# Altium PCB LKS_DEMO_V5.0.PcbDoc (part 1 of 4)
Units mil, origin at the board's own origin, x right, y up, seen from the top; angles counter-clockwise.
Board outline 5414.8 x 3354.56 mil, 2 copper layers (Top Layer, Bottom Layer); 131 components, 85 nets, 355 pads, 272 vias.
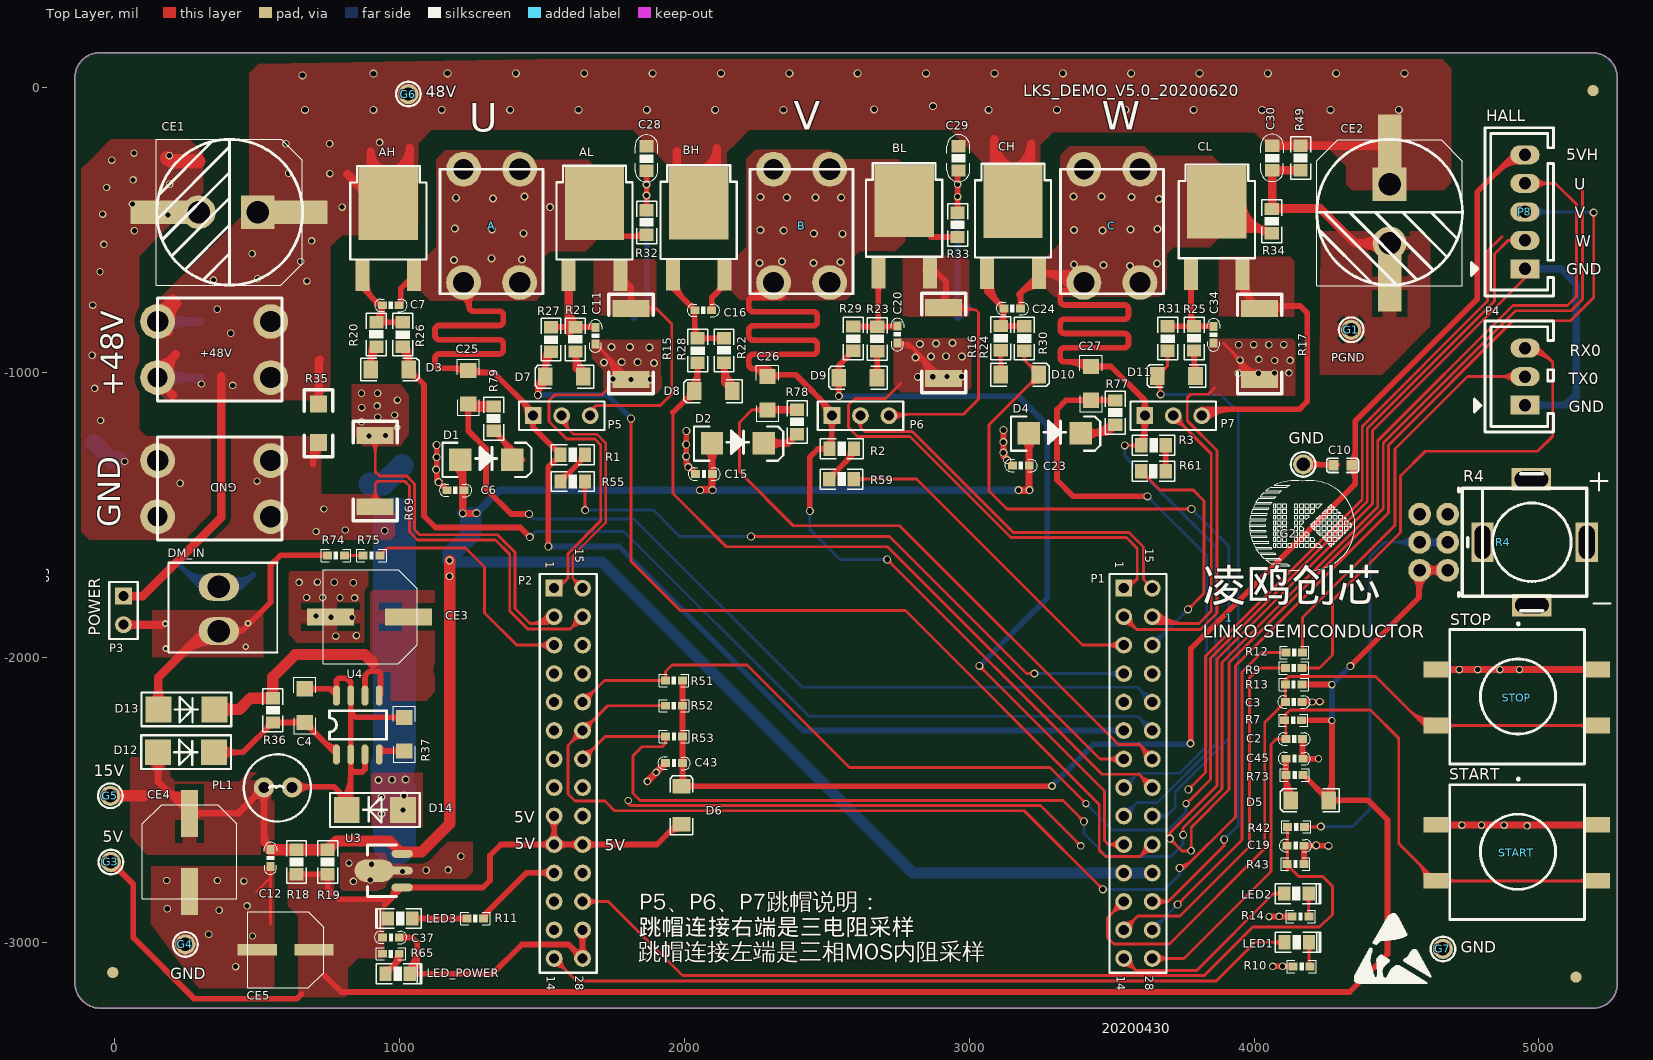
[diagram p0: Top Layer view]
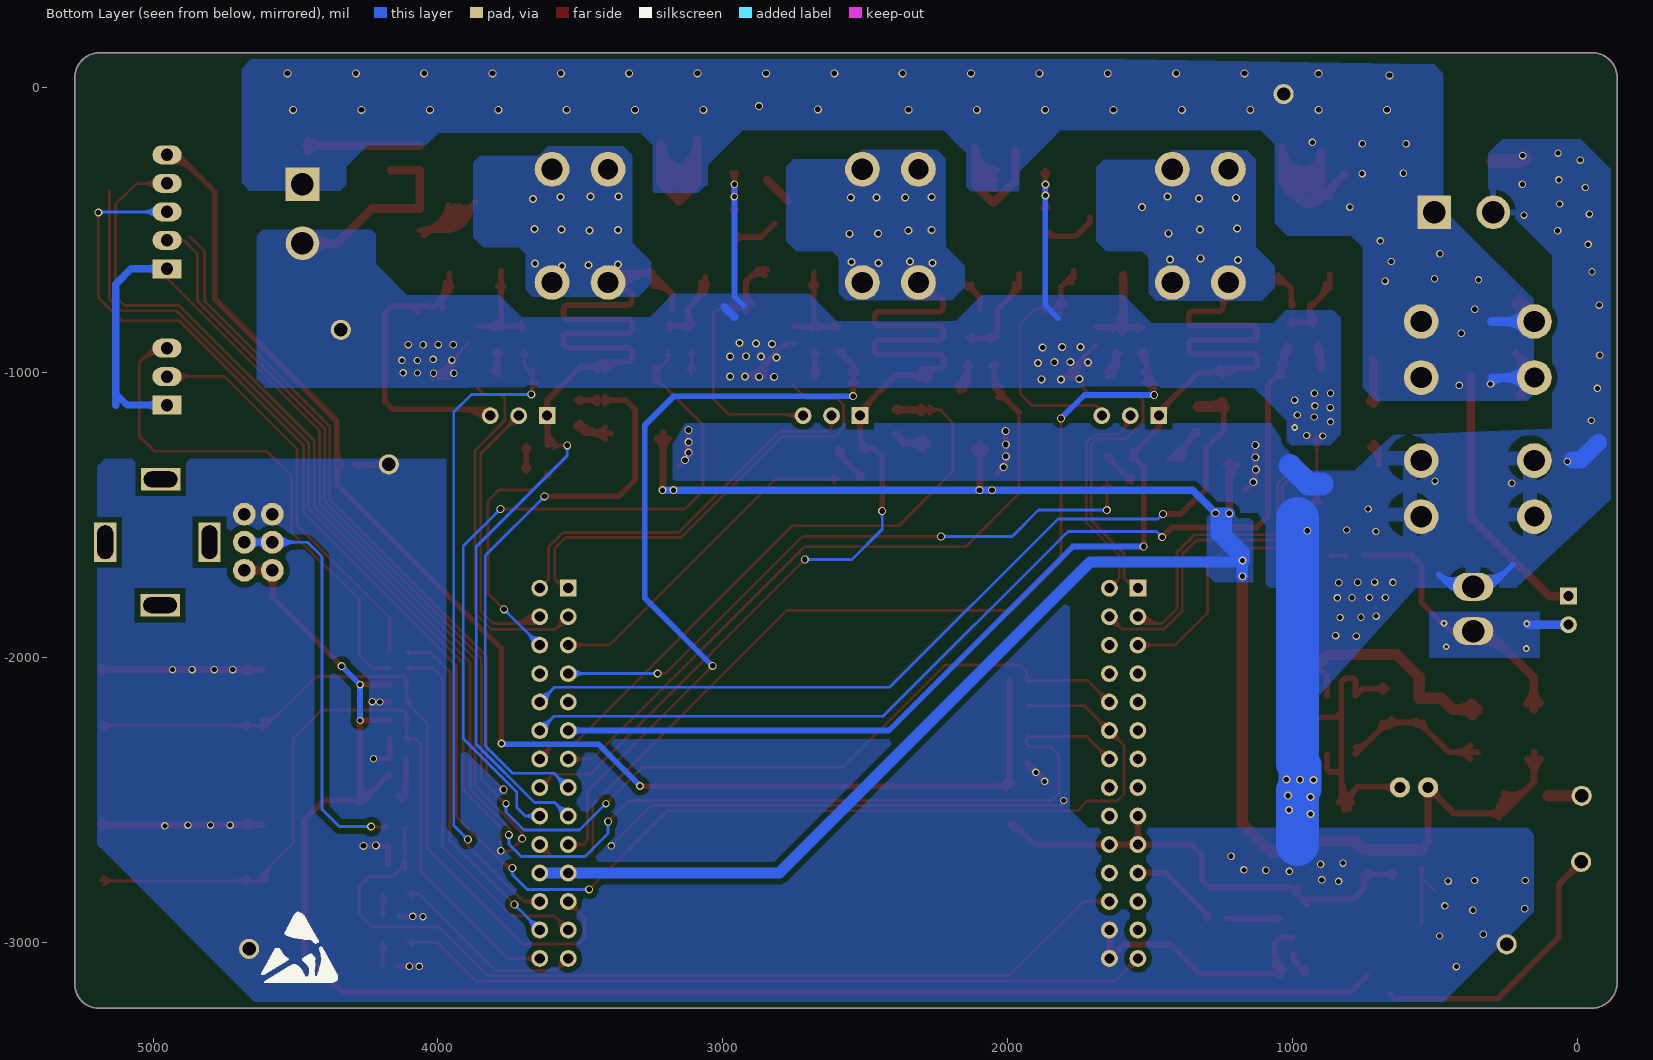
[diagram p1: Bottom Layer view, seen from below]

## Layer stack, top to bottom
Top Layer: signal copper 1.4
Dielectric: dielectric 12.6, FR-4, Dk 4.8
Bottom Layer: signal copper 1.4

## Board outline
-140.37,-3140.27 ccw(c-48.64,-3140.27) -48.64,-3232 5190.27,-3231.65 ccw(c5190.27,-3147.49) 5274.43,-3147.49 5274.43,35.95 ccw(c5187.82,35.95) 5187.82,122.56 -53.53,122.56 ccw(c-53.53,35.95) -140.14,35.95

## Design rules (kind name [scope] priority, off if disabled: settings)
Clearance [InPolygon] p1: gap=20
Clearance Clearance_48V [InNet('+48V')] p2: gap=30
Clearance Clearance_4 [InNet('PGND')] p3 off: gap=20
Clearance Clearance_5V [InNet('+5V')] p4 off: gap=20
Clearance Clearance_15V [InNet('+15V')] p5: gap=20
Clearance Clearance_5 [All] p6: gap=7.87
ComponentClearance [All] p1 off: gap=0 collisioncheckmode=3 verticalgap=0 showdistances=FALSE
FabricationTestpoint [(IsPad And (OnTopLayer Or OnBottomLayer))] p1: side=3 testpointundercomponent=TRUE minsize=40 maxsize=100 preferedsize=60 minholesize=0 maxholesize=40 preferedholesize=32 testpointgrid=1 allowsidetop=TRUE allowsidebottom=TRUE usegrid=TRUE gridtolerance=0.01
PlaneConnect [All] p1: planeconnectstyle=Direct reliefexpansion=20 reliefentries=4 reliefconductorwidth=10 reliefairgap=10
PolygonConnect [All] p1: connectstyle=Direct reliefconductorwidth=50 reliefentries=4 polygonreliefangle="90 Angle"
RoutingVias [All] p1: holewidth=13.78 width=19.68 viastyle="Through Hole" minholewidth=13.78 minwidth=19.68 maxholewidth=13.78 maxwidth=19.68
SilkscreenOverComponentPads SilkToSolderMaskClearance [IsPad] p1: minsilkscreentomaskgap=10
SolderMaskExpansion [All] p1: expansion=4
Width Width_2 [All] p1 off: maxlimit=10 minlimit=10 preferedwidth=10
Width Width_1 [InNet('5V-T')] p2 off: maxlimit=40 minlimit=40 preferedwidth=40
Width Width_VH [InNet('5V1')] p3 off: maxlimit=40 minlimit=40 preferedwidth=40
Width Width_5V [InNet('5V')] p4 off: maxlimit=40 minlimit=40 preferedwidth=40
Width Width_14.3V [InNet('+14.3V')] p5 off: maxlimit=50 minlimit=50 preferedwidth=50
Width Width_15V [InNet('+15V')] p6 off: maxlimit=40 minlimit=40 preferedwidth=40
Width Width_48V [InNet('+48V')] p7 off: maxlimit=40 minlimit=40 preferedwidth=40
Width [All] p8: maxlimit=200 minlimit=1 preferedwidth=40
24 further rules are at their usual default settings.

## Components (designator, comment, footprint, x,y, rotation, side; value= is the part's Value field where it differs from the comment)
1 "LKS_sign" LKS_LOGO2 3913.31,-1861.12 r0 top
+48V "M4" M4_CONECTOR 587.24,-737.97 r180 top
A "M4" M4_CONECTOR 1503.84,-723.16 r90 top
AH "NCE8295AK" TO-252 960.46,-532.18 r0 top
AL "NCE8295AK" TO-252 1684.09,-531.73 r0 top
B "M4" M4_CONECTOR 2592.15,-723.16 r90 top
BH "NCE8295AK" TO-252 2050.06,-530.17 r0 top
BL "NCE8295AK" TO-252 2771.14,-522.9 r0 top
C "M4" M4_CONECTOR 3681.8,-723.16 r90 top
C2 "100nF/50V" 0603C#1 4170.04,-2286.71 r180 top
C3 "100nF/50V" 0603C#1 4109.35,-2156.04 r0 top
C4 "10uF/100V" 1206#1 666.13,-2227.86 r90 top (schematic designator CF2)
C6 "100nF/50V" 0603C#1 1166.15,-1413.01 r0 top
C7 "10nF/50V" 0603C#1 939.25,-763.4 r0 top
C10 "100nF/50V" 0603C#2 4310.55,-1325.62 r180 top
C11 "10nF/50V" 0603C#1 1687.64,-841.38 r270 top
C12 "100nF/50V" 0603C#1 546.38,-2675.06 r270 top (schematic designator C351)
C15 "100nF/50V" 0603C#1 2039.42,-1355.82 r0 top
C16 "10nF/50V" 0603C#1 2036.35,-781.02 r0 top
C19 "100nF/50V" 0603C#1 4174.8,-2661.32 r180 top
C20 "10nF/50V" 0603C#1 2747.52,-836.3 r270 top
C23 "100nF/50V" 0603C#1 3151.34,-1325.92 r0 top
C24 "10nF/50V" 0603C#1 3121.14,-774.76 r0 top
C25 "10uF/25V" 1206#1 1240.4,-1110.36 r90 top (schematic designator CAH1)
C26 "10uF/25V" 1206#1 2291.34,-1131.27 r90 top (schematic designator CBH1)
C27 "10uF/25V" 1206#1 3426.66,-1096.7 r90 top (schematic designator CCH1)
C28 "100nF/100V" 0805C 1866.99,-290.99 r90 top (schematic designator CA)
C29 "100nF/100V" 0805C 2961.99,-290.67 r90 top (schematic designator CB)
C30 "100nF/100V" 0805C 4063.55,-289.6 r90 top (schematic designator CC)
C34 "10nF/50V" 0603C#1 3857.8,-837.72 r270 top
C37 "100nF/50V" 0603C#1 998.61,-2983.24 r180 top
C43 "100nF/50V" 0603C#1 1933.69,-2371.26 r0 top
C45 "100nF/50V" 0603C#1 4170.76,-2355.72 r180 top
CE1 "220uF/63V" "220UF/25V 12.5*12.5" 503.17,-437.15 r270 top (schematic designator CC3)
CE2 "220uF/63V" "220UF/25V 12.5*12.5" 4475.37,-337.23 r0 top (schematic designator CC1)
CE3 "10UF/100V" "220UF/25V paster8*10" 894.06,-1857.56 r270 top (schematic designator CF1)
CE4 "220uF/25V  8*10" "220UF/25V paster8*10" 262.36,-2684.79 r0 top (schematic designator C391)
CE5 "220uF/16V" "220UF/16V PASTER6.3*7.7 - DUPLICATE" 599.7,-3026.55 r270 top (schematic designator C36)
CH "NCE8295AK" TO-252 3153.33,-524.74 r0 top
CL "NCE8295AK" TO-252 3869.04,-527.35 r0 top
D1 "US1J" SMA金丰 1304.37,-1305.74 r0 top
D2 "US1J" SMA金丰 2187.53,-1248.27 r0 top
D3 "1N4007" D1206#1 898.55,-988.88 r0 top
D4 "US1J" SMA金丰 3300.41,-1213.21 r0 top
D5 "1N4007" D1206#2 4130.39,-2500.13 r0 top
D6 "1N4007" D1206#2 1990.99,-2454.23 r270 top
D7 "1N4007" D1206#1 1645.15,-1014.31 r180 top
D8 "1N4007" D1206#1 2167.67,-1065.43 r180 top
D9 "1N4007" D1206#1 2675.86,-1018.22 r180 top
D10 "1N4007" D1206#1 3110.43,-1007.51 r0 top
D11 "1N4007" D1206#1 3793.99,-1012.14 r180 top
D12 "ES1J" DO-214AC 250.05,-2333.06 r0 top (schematic designator DP1)
D13 "1N4007" DO-214AC 251.5,-2182.97 r0 top (schematic designator DD6)
D14 "ES1J" DO-214AC 912.83,-2535.22 r180 top (schematic designator D02)
DM_IN "CON2" SIP3.96-2 365.35,-1907.97 r90 top
G1 "PAD1.2" PAD1.2 4340.63,-849.76 r0 top
G2 "PAD1.2" PAD1.2 4171.95,-1322.36 r0 top
G3 "PAD1.2" PAD1.2 -13.75,-2718.17 r0 top
G4 "PAD1.2" PAD1.2 247.83,-3007.54 r0 top
G5 "PAD1.2" PAD1.2 -15.81,-2485.75 r0 top
G6 "PAD1.2" PAD1.2 1030.82,-22.05 r0 top (schematic designator G12)
G7 "PAD1.2" PAD1.2 4662.85,-3023.47 r0 top
GND "M4" M4_CONECTOR 587.24,-1226.14 r180 top
LED1 "LED" SOD323 4146.77,-2998.22 r0 top
LED2 "LED" SOD323 4145.98,-2827.12 r0 top
LED3 "LED" SOD323 1003.88,-2918.56 r180 top
LED_POWER "LED_R" SOD323 990.38,-3108.82 r0 top (schematic designator LED)
P1 "Header 14X2A" HDR2X14_CEN 3542.25,-1756.82 r270 top (schematic designator P7)
P2 "Header 14X2A" HDR2X14_CEN 1542.25,-1756.82 r270 top (schematic designator P5)
P3 "Header 2" HDR1X2 30.28,-1784.94 r270 top
P4 "P13" 2.54-XH-3A-180 4950.98,-1114.16 r270 top (schematic designator P13)
P5 "Header 3" HDR1X3 1468.79,-1151.24 r0 top (schematic designator P17)
P6 "Header 3" HDR1X3 2517.75,-1151.24 r0 top (schematic designator P18)
P7 "Header 3" HDR1X3 3616.05,-1151.24 r0 top (schematic designator P19)
P8 "Header 5" 2.54-XH-5A-180 4950.7,-435.64 r270 top (schematic designator P21)
PL1 "330uH" L_DIP_6*8MM 523.71,-2456.42 r0 top
R1 "20K 1%" 0805R 1650.48,-1288.54 r180 top
R2 "20K 1%" 0805R 2594.94,-1267.81 r180 top
R3 "20K 1%" 0805R 3689.51,-1255.52 r180 top
R4 "RPot" RK097-W-1 4874.36,-1595.66 r270 top
R7 "10K" 0603R 4166.32,-2220.83 r180 top
R9 "10R" 0603R 4109.61,-2037.33 r0 top
R10 "1K1%" 0603R 4195.91,-3084.6 r180 top
R11 "1K1%" 0603R 1236.12,-2916.6 r0 top (schematic designator R27)
R12 "10R" 0603R 4170.04,-1982.47 r180 top
R13 "10K" 0603R 4109.35,-2095.34 r0 top
R14 "1K1%" 0603R 4192,-2909.82 r180 top
R15 "0.005R/2512" 2512 1812.75,-776.09 r270 top (schematic designator R301)
R16 "0.005R/2512" 2512 2909.76,-1019.43 r90 top (schematic designator R302)
R17 "0.005R/2512" 2512 4019.41,-776.09 r270 top (schematic designator R303)
R18 "1.5K" 0805R 637.92,-2675.77 r270 top (schematic designator R791)
R19 "1.5K" 0805R 747.07,-2675.77 r270 top (schematic designator R761)
R20 "10R" 0805R 918.27,-823.64 r270 top (schematic designator K+A1)
R21 "10R" 0805R 1616.94,-840.56 r270 top (schematic designator K-A1)
R22 "10R" 0805R 2138.61,-879.87 r270 top (schematic designator K+B1)
R23 "10R" 0805R 2676.33,-839.51 r270 top (schematic designator K-B1)
R24 "10R" 0805R 3110.16,-836.37 r270 top (schematic designator K+C1)
R25 "10R" 0805R 3789.15,-837.14 r270 top (schematic designator K-C1)
R26 "51R" 0805R 1010.51,-909.43 r90 top (schematic designator K1)
R27 "51R" 0805R 1531.29,-926.62 r90 top (schematic designator K2)
R28 "51R" 0805R 2046.11,-965.39 r90 top (schematic designator K3)
R29 "51R" 0805R 2592.71,-923.58 r90 top (schematic designator K4)
R30 "51R" 0805R 3192.94,-922.91 r90 top (schematic designator K5)
R31 "51R" 0805R 3696.16,-923.03 r90 top (schematic designator K6)
R32 "51K" 0805R 1866.99,-429.93 r270 top (schematic designator RA1)
R33 "51K" 0805R 2958.78,-438.57 r270 top (schematic designator RB1)
R34 "51K" 0805R 4061.82,-425.61 r270 top (schematic designator RC1)
R35 "47K/0805" 1206#2 715.63,-1177.64 r270 top (schematic designator RA-5)
R36 "150K" 0805R 554.9,-2228.54 r90 top (schematic designator RP1)
R37 "1R" 1206#1 1016.08,-2328.28 r90 top (schematic designator RP2)
R42 "10K" 0603R 4176.57,-2594.78 r180 top
R43 "20K1%" 0603R 4174.28,-2725.73 r180 top
R49 "51K" 0805R 4162.89,-204.18 r270 top
R51 "2K" 0603R 1933.22,-2081.37 r0 top
R52 "2K" 0603R 1933.48,-2169.52 r0 top
R53 "2K" 0603R 1933.69,-2278.19 r0 top
R55 "20K 1%" 0805R 1650.48,-1382.3 r180 top
R59 "20K 1%" 0805R 2594.28,-1374.16 r180 top
R61 "20K 1%" 0805R 3603.91,-1346.42 r0 top
R65 "3.3K" 0603R 939.57,-3040.48 r0 top
R69 "0.005R/2512" 2512 914.66,-1222.47 r270 top
R73 "10K" 0603R 4171.21,-2412.65 r180 top
R74 "20K1%" 0603R 746.62,-1641.8 r0 top
R75 "20K1%" 0603R 871.84,-1641.8 r0 top
R77 "4.7R" 0805R 3512.15,-1097.85 r270 top
R78 "4.7R" 0805R 2395.27,-1130.53 r270 top
R79 "4.7R" 0805r 1329.96,-1118.93 r270 top
START "SW-PB" "SW-PB  12*12" 4922.12,-2685.6 r0 top
STOP "SW-PB" "SW-PB  12*12" 4922.12,-2140.75 r0 top
U3 "LM7805" SOT-89 959.68,-2748.61 r90 top
U4 "LKS611" so-8 780.21,-2340.28 r90 top

## Footprints (in the part's own frame and the unit in brackets; to place one, negate y for a bottom-side part, rotate by r counter-clockwise, add the part's x,y. Pads: shape width x height; smd on the part's side, far side on the other; paste and mask are expansions set on the pad)
2.54-XH-3A-180 [mm]
  rect 1.7x2.6 hole 1.1: 1(0,0)
  oval 1.7x2.6 hole 1.1: 2(-2.54,0) 3(-5.08,0)
  silkscreen extent -7.49,-4.5 2.41,2.54
2.54-XH-5A-180 [mm]
  rect 1.7x2.6 hole 1.1: 1(5.08,0)
  oval 1.7x2.6 hole 1.1: 2(2.54,0) 3(0,0) 4(-2.54,0) 5(-5.08,0)
  silkscreen extent -7.49,-4.78 7.49,2.54
"220UF/16V PASTER6.3*7.7 - DUPLICATE" [mm]
  rect 1x3.5 smd: 1(0,2.54) 2(0,-2.54)
  silkscreen extent -3.4,-3.4 3.4,3.4
"220UF/25V 12.5*12.5" [mm]
  rect 2.1x5.5 smd: 1(0,3.429)
  rect 3x3 hole 2: 1(0,-0.04)
  round 3 hole 2: 2(0,-5.3)
  rect 2.1x5 smd: 2(0,-8.867)
  silkscreen extent -6.5,-9.07 6.5,3.96
"220UF/25V paster8*10" [mm]
  rect 1.5x4.2 smd: 1(0,3.492) 2(0,-3.492)
  silkscreen extent -4.2,-4.13 4.2,4.27
0603C#1 [mm]
  rect 0.8x0.7 smd: 1(0,0) 2(1.5,0)
  silkscreen extent -0.68,-0.57 2.21,0.55
0603C#2 [mm]
  rect 0.9x0.95 smd: 1(-0.813,0) 2(0.813,0)
  silkscreen extent -1.42,-0.64 1.42,0.64
0603R [mm]
  rect 0.8x0.7 smd: 1(0,0) 2(1.5,0)
  silkscreen extent -0.55,-0.55 2.05,0.55
0805C [mm]
  rect 1.1x1.27 smd: 1(0,0) 2(2.175,0)
  silkscreen extent -1,-1.01 3.2,1.03
0805R [mm]
  rect 1.1x1.27 smd: 1(0,0) 2(2.175,0)
  silkscreen extent -0.81,-0.89 3,0.89
0805r [mm]
  rect 1.1x1.27 smd: 1(0,0) 2(2.175,0)
  silkscreen extent -0.81,-0.89 3,0.89
1206#1 [mm]
  rect 1.35x1.45 smd: 1(-0.01,-0.01) 2(2.99,-0.01)
  silkscreen extent -1.02,-1 4,0.98
1206#2 [mm]
  rect 1.524x1.524 smd: 1(-1.714,0) 2(1.714,0)
  silkscreen extent -2.98,-1.27 2.98,1.27
2512 [mm]
  rect 1.5x3.3 smd: 1(-0.04,-0.01) 2(6.31,-0.01)
  silkscreen extent -1.31,-1.98 7.56,1.96
D1206#1 [mm]
  rect 1.3x1.6 smd: 1(0,0) 2(3.4,0)
  silkscreen extent -0.91,-1.02 4.31,1.02
D1206#2 [mm]
  rect 1.3x1.6 smd: 1(3.346,-0.04) 2(-0.054,-0.04)
  silkscreen extent -0.97,-1.06 4.26,0.98
DO-214AC [mm]
  rect 2.3x2.3 smd: 1(-2.502,0) 2(2.502,0)
  silkscreen extent -4,-1.5 4,1.52
HDR1X2 [mm] "Connector; Header; 2 Position"
  rect 1.5x1.5 hole 0.9: 1(0,0)
  round 1.5 hole 0.9: 2(2.54,0)
  silkscreen extent -1.27,-1.27 3.81,1.27
HDR1X3 [mm]
  rect 1.5x1.5 hole 0.9: 1(0,0)
  round 1.5 hole 0.9: 2(2.54,0) 3(5.08,0)
  silkscreen extent -1.27,-1.27 6.35,1.27
HDR2X14_CEN [mm] "Connector; Header; 14x2 Position"
  rect 1.5x1.5 hole 0.9: 1(0,0)
  round 1.5 hole 0.9: 2(2.54,0) 3(5.08,0) 4(7.62,0) 5(10.16,0) 6(12.7,0) 7(15.24,0) 8(17.78,0) 9(20.32,0) 10(22.86,0) 11(25.4,0) 12(27.94,0) 13(30.48,0) 14(33.02,0) 15(0,2.54) 16(2.54,2.54) 17(5.08,2.54) 18(7.62,2.54) 19(10.16,2.54) 20(12.7,2.54) 21(15.24,2.54) 22(17.78,2.54) 23(20.32,2.54) 24(22.86,2.54) 25(25.4,2.54) 26(27.94,2.54) 27(30.48,2.54) 28(33.02,2.54)
  silkscreen extent -1.27,-1.27 34.29,3.81
L_DIP_6*8MM [mm]
  round 1.8 hole 1: 1(0,0) 2(2.5,0)
  silkscreen extent -1.8,-3.04 4.2,2.96
LKS_LOGO2 [mil]
  silkscreen extent 70,167 440,482
M4_CONECTOR [mm]
  round 3.1 hole 1.9: 1(1,7.1) 1(1,2.1) 1(11.1,2.1)
  round 3.1 hole 1.8: 1(11.1,7.1)
  silkscreen extent 0,0 11.1,9.2
PAD1.2 [mm]
  round 1.8 hole 1.2: 1(0,0)
  silkscreen extent -1.1,-1.1 1.1,1.1
RK097-W-1 [mm] "电位器-"
  rect 2x3.5 hole 1.4 slot 3 at 90 deg: 0(-5.613,2.503) 0(5.613,2.554)
  rect 3.5x2 hole 1.4 slot 3 at 0 deg: 0(0,7.45) 0(0,-1.85)
  round 2.032 hole 1.1: 1(2.5,-7.45) 2(-2.5,-7.45) 3(0,-7.45) 4(-2.5,-4.95) 5(0,-4.95) 6(2.5,-4.95)
  silkscreen extent -6.1,-3.95 6.1,7.45
SIP3.96-2 [mm]
  oval 2.5x3.6 hole 2: 1(0,0) 2(3.96,0)
  silkscreen extent -1.91,-5.21 6.1,4.5
SMA金丰 [mm]
  rect 2x2 smd: 1(-2.312,0) 2(2.313,0)
  silkscreen extent -3.91,-1.55 4.04,1.5
so-8 [mm]
  oval 1.8x0.61 smd: 1(-0.02,0.05) 2(-0.02,-1.22) 3(-0.02,-2.49) 4(-0.02,-3.76) 5(5.238,-3.76) 6(5.238,-2.49) 7(5.238,-1.22) 8(5.238,0.05)
  silkscreen extent 1.35,-4.4 3.89,0.68
SOD323 [mil]
  rect 43.31x50 smd: 1(-40,-2) 2(45.63,-2)
  silkscreen extent -72,-37 87,33
SOT-89 [mm]
  oval 0.7x1.9 smd: 1(-1.5,-1.25) 3(1.5,-1.25)
  oval 2x3.5 smd: 2(0,1.25)
  oval 0.7x2.1 smd: 2(0,-1.15)
  silkscreen extent -2.3,-0.75 2.3,1.85
"SW-PB  12*12" [mm]
  rect 2.2x1.397 smd: 1(-7.2,2.5) 2(-7.2,-2.5) 3(7.2,2.5) 4(7.2,-2.5)
  silkscreen extent -5.98,-5.94 6.02,6.68
TO-252 [mm]
  rect 1.25x2.85 smd: 1(-2.3,-3.2) 3(2.3,-3.2)
  rect 5.3x6.5 smd: 2(0,3.2)
  silkscreen extent -3.4,-1.8 3.4,6.55

## Part data
A B C: library part Socket, "Socket"
C4: library part Cap, "Capacitor"
CE1 CE3: library part CD, "Electrolytic Capacitor"
CE2: library part "Cap Pol1", "Polarized Capacitor (Radial)"
D3 D7 D8 D9 D10 D11: library part Diode, "Default Diode"
D5 D6: library part "Diode 1N4007", "1 Amp General Purpose Rectifier"
D12 D13 D14: library part D, "Diode"
DM_IN: "Connector"
G1 G2 G3 G4 G5 G6 G7: library part CON1, "Connector"
LED_POWER: library part LED
P1: "Header, 14-Pin, Dual row"
P3: "Header, 2-Pin"
P8: "Header, 5-Pin"
PL1: library part L
R1 R2 R3: library part RES/1
R4: "Potentiometer"
R11 R36 R37: library part Res2, "Resistor"
R18 R19: library part R-2W, "1W或2W?"
R20 R21 R22 R23 R24 R25 R26 R27 R28 R29 R30 R31: library part Res1, "Resistor"
R35 R42 R43 R74 R75: library part R
R69: library part RES2?
R79: library part RES2短
START STOP: "Switch"

## Free pads (board coordinates)
  round 39.37 / inner round 0 / far side round 0 all layers, no hole: 1(-7.22,-3106.07) 3(5189.97,-9.89) 4(5129.69,-3122.48)

## Via types
v1: diameter 26, hole 18, Top Layer to Bottom Layer, 117 vias
v2: diameter 28, hole 20, Top Layer to Bottom Layer, 77 vias
v3: diameter 28, hole 18, Top Layer to Bottom Layer, 73 vias
v4: diameter 23.62, hole 11.81, Top Layer to Bottom Layer, 5 vias

## Nets (pads, with @x,y where several pads share a name; then routed paths per layer and width w, separated by ;. In a path a pad name is that pad's centre, name@x,y a point inside that pad or via, vN(x,y) a via of type N, cw(c..) or ccw(c..) an arc to the next point about the centre after c; other vN are vias at no path point)
5V-T: C45.2 D5.2 R73.2 | length 344.8
  Top Layer w20: R73.2@4111.7,-2412.19 C45.2@4111.7,-2355.72 ; D5.2@4112.15,-2485.74 R73.2@4112.15,-2412.65 ; 4112.15,-2467.56 ccw(c4156.51,-2467.56) 4125.15,-2498.92 cw(c4156.51,-2467.56) 4112.15,-2467.56 ; R73.2@4112.15,-2419.27 ccw(c4204.79,-2419.27) 4139.29,-2484.78 cw(c4204.79,-2419.27) R73.2@4112.15,-2419.27
5VH: C10.1 C43.2 D6.2 P8.5 R51.2 R52.2 R53.2 | length 5492.9
  Top Layer w20: D6.2@1989.42,-2452.1 v3@3289.67,-2452.1 ; R52.2@1992.54,-2169.52 R52.2@1992.75,-2169.52 ; D6.2@1992.75,-2448.77 R51.2@1992.75,-2081.84 ; v3@3777.74,-2302.94 3777.74,-1968.54 4354.39,-1391.89 4354.39,-1170.91 4782.69,-742.6 4782.69,-366.17 4913.23,-235.64 P8.5@4950.7,-235.64 ; D6.2@2006.35,-2441.08 ccw(c2032.96,-2414.46) 2032.96,-2452.1 ; D6.2@2006.35,-2441.08 cw(c2039.18,-2408.25) 1992.75,-2408.25 ccw(c2039.18,-2408.25) D6.2@2006.35,-2441.08 ; D6.2@2006.35,-2441.08 ccw(c2032.96,-2414.46) 2032.96,-2452.1 ; 2032.96,-2452.1 ccw(c2032.96,-2489.74) 2006.35,-2463.13 cw(c2032.96,-2489.74) 2032.96,-2452.1 ; D6.2@1984.3,-2441.08 ccw(c1963.9,-2420.68) 1992.75,-2420.68 cw(c1963.9,-2420.68) D6.2@1984.3,-2441.08 ; C10.1@4337.09,-1332.06 cw(c4295.34,-1373.81) 4354.39,-1373.81 ccw(c4295.34,-1373.81) C10.1@4337.09,-1332.06 ; C10.1@4337.09,-1319.18 ccw(c4295.34,-1277.43) 4354.39,-1277.43 cw(c4295.34,-1277.43) C10.1@4337.09,-1319.18 ; 4859.2,-289.66 cw(c4932.98,-363.44) 4932.98,-259.1 ccw(c4932.98,-363.44) 4859.2,-289.66 ; 4893.34,-255.52 cw(c4932.98,-295.16) 4932.98,-239.1 ccw(c4932.98,-295.16) 4893.34,-255.52
  Bottom Layer w20: v3(3289.67,-2451.14) 3435.89,-2304.92 3774.41,-2304.92 v3(3776.77,-2302.56) ; 3761.41,-2304.92 ccw(c3761.41,-2287.2) 3773.94,-2299.73 cw(c3761.41,-2287.2) 3761.41,-2304.92
+5V: C37.2 CE5.1 D5.1 D6.1 G3.1 LED3.2 P2.9 P2.10 P2.24 R4.1 R4.6 R7.1 R13.2 R18.2 R19.2 R65.1 R73.1 U3.1 | length 11175.9
  Top Layer w20: G3.1@-13.75,-2718.17 64.46,-2796.38 64.46,-2983.74 279.1,-3198.38 639.24,-3198.38 655.62,-3181.99 ; R18.2@637.92,-2761.01 747.07,-2761.01 747.07,-2809.07 787,-2849 967.55,-2849 ; 738.26,-3117.97 794.75,-3174.47 4335.11,-3174.47 4467.98,-3041.6 4467.98,-2569.96 4399.74,-2501.71 D5.1@4262.12,-2501.71 ; 947.87,-2868.69 U3.1@1008.89,-2807.66 1292.23,-2807.66 1317,-2782.89 1317,-2695.27 1355.46,-2656.82 P2.10@1542.25,-2656.82 ; P2.9@1542.25,-2556.82 P2.10@1542.25,-2656.82 ; D6.1@1989.42,-2585.96 1973.94,-2585.96 1903.08,-2656.82 P2.24@1642.25,-2656.82 P2.10@1542.25,-2656.82 ; R7.1@4166.32,-2220.83 v1@4272.99,-2220.83 ; R13.2@4168.4,-2095.34 v1(4273,-2095.35) ; R73.1@4171.21,-2412.65 4172.92,-2412.65 D5.1@4262.02,-2501.75 ; D5.1@4272.99,-2490.84 v1(4272.99,-2221.42) ; v2(4337.69,-2030.68) 4578.6,-1789.77 4578.6,-1692.52 R4.6@4677.02,-1692.52 ; 29.67,-2761.58 ccw(c-13.75,-2805) -13.75,-2743.6 cw(c-13.75,-2805) 29.67,-2761.58 ; 29.67,-2761.58 cw(c73.08,-2718.17) 11.68,-2718.17 ccw(c73.08,-2718.17) 29.67,-2761.58 ; 747.07,-2789.53 ccw(c718.94,-2789.53) 738.83,-2769.64 cw(c718.94,-2789.53) 747.07,-2789.53 ; 747.07,-2789.53 cw(c775.21,-2789.53) 755.32,-2769.64 ccw(c775.21,-2789.53) 747.07,-2789.53 ; 1495.11,-2656.82 ccw(c1495.11,-2609.67) P2.10@1528.44,-2643.01 ; 1495.11,-2656.82 cw(c1495.11,-2703.96) 1528.44,-2670.62 ccw(c1495.11,-2703.96) 1495.11,-2656.82 ; 1495.11,-2656.82 ccw(c1495.11,-2609.67) P2.10@1528.44,-2643.01 ; P2.10@1528.44,-2643.01 ccw(c1495.11,-2609.67) 1542.25,-2609.67 ; P2.10@1528.44,-2643.01 ccw(c1495.11,-2609.67) 1542.25,-2609.67 ; 1542.25,-2609.67 ccw(c1589.39,-2609.67) P2.10@1556.06,-2643.01 ; 1542.25,-2609.67 ccw(c1589.39,-2609.67) P2.10@1556.06,-2643.01 ; 1542.25,-2603.96 ccw(c1495.11,-2603.96) 1528.44,-2570.62 cw(c1495.11,-2603.96) 1542.25,-2603.96 ; 1542.25,-2603.96 cw(c1589.39,-2603.96) 1556.06,-2570.62 ccw(c1589.39,-2603.96) 1542.25,-2603.96 ; P2.10@1556.06,-2643.01 ccw(c1589.39,-2609.67) 1589.39,-2656.82 ; P2.10@1556.06,-2643.01 ccw(c1589.39,-2609.67) 1589.39,-2656.82 ; 1589.39,-2656.82 ccw(c1589.39,-2703.96) 1556.06,-2670.62 cw(c1589.39,-2703.96) 1589.39,-2656.82 ; 1595.11,-2656.82 ccw(c1595.11,-2609.67) 1628.44,-2643.01 cw(c1595.11,-2609.67) 1595.11,-2656.82 ; 1595.11,-2656.82 cw(c1595.11,-2703.96) 1628.44,-2670.62 ccw(c1595.11,-2703.96) 1595.11,-2656.82 ; 1689.39,-2656.82 ccw(c1689.39,-2703.96) 1656.06,-2670.62 cw(c1689.39,-2703.96) 1689.39,-2656.82 ; 1689.39,-2656.82 cw(c1689.39,-2609.67) 1656.06,-2643.01 ccw(c1689.39,-2609.67) 1689.39,-2656.82 ; 4299.76,-2501.71 ccw(c4299.76,-2539.35) 4273.15,-2512.73 cw(c4299.76,-2539.35) 4299.76,-2501.71 ; 4299.76,-2501.71 cw(c4299.76,-2464.07) 4273.15,-2490.69 ccw(c4299.76,-2464.07) 4299.76,-2501.71 ; R4.1@4602.27,-1715.3 cw(c4657.26,-1770.29) 4657.26,-1692.52 ccw(c4657.26,-1770.29) R4.1@4602.27,-1715.3 ; R4.1@4602.27,-1715.3 ccw(c4659.41,-1772.44) 4578.6,-1772.44 cw(c4659.41,-1772.44) R4.1@4602.27,-1715.3 ; R18.2@649.51,-2769.64 cw(c670.34,-2790.47) 670.34,-2761.01 ccw(c670.34,-2790.47) R18.2@649.51,-2769.64 ; R18.2@649.51,-2753.16 ccw(c668.47,-2734.2) 668.47,-2761.01 cw(c668.47,-2734.2) R18.2@649.51,-2753.16 ; 714.66,-2761.01 cw(c714.66,-2790.47) 735.49,-2769.64 ccw(c714.66,-2790.47) 714.66,-2761.01 ; 716.53,-2761.01 ccw(c716.53,-2734.2) 735.49,-2753.16 cw(c716.53,-2734.2) 716.53,-2761.01 ; 962.11,-2854.44 ccw(c915.34,-2807.66) 981.49,-2807.66 cw(c915.34,-2807.66) 962.11,-2854.44 ; U3.1@996.26,-2820.3 ccw(c983.62,-2807.66) 1001.49,-2807.66 cw(c983.62,-2807.66) U3.1@996.26,-2820.3 ; 1940.55,-2619.35 cw(c1983.51,-2662.31) 1983.51,-2601.55 ccw(c1983.51,-2662.31) 1940.55,-2619.35 ; 4225.18,-2464.91 ccw(c4262.12,-2427.97) 4262.12,-2480.21 cw(c4262.12,-2427.97) 4225.18,-2464.91 ; D5.1@4239.78,-2479.51 cw(c4223.49,-2495.8) 4246.53,-2495.8 ccw(c4223.49,-2495.8) D5.1@4239.78,-2479.51 ; D5.1@4251.1,-2484.78 ccw(c4198.25,-2431.93) 4272.99,-2431.93 cw(c4198.25,-2431.93) D5.1@4251.1,-2484.78 ; R4.1@4559.84,-1715.3 cw(c4514.56,-1760.58) 4578.6,-1760.58 ccw(c4514.56,-1760.58) R4.1@4559.84,-1715.3 ; R4.1@4602.27,-1672.87 ccw(c4649.7,-1625.44) 4649.7,-1692.52 cw(c4649.7,-1625.44) R4.1@4602.27,-1672.87 ; R4.1@4603.27,-1692.52 cw(c4603.27,-1770.29) 4658.27,-1715.3 ccw(c4603.27,-1770.29) R4.1@4603.27,-1692.52 ; R4.1@4610.84,-1692.52 ccw(c4610.84,-1625.44) 4658.27,-1672.87 cw(c4610.84,-1625.44) R4.1@4610.84,-1692.52
  Bottom Layer w20: v1(4272.99,-2221.42) v1(4273,-2095.35) v2@4337.68,-2030.67
+15V: C6.2 C12.1 C15.2 C23.2 CE4.1 D1.1 D2.1 D4.1 D12.1 G5.1 P1.11 P1.25 PL1.1 R18.1 R19.1 U3.3 | length 10742.6
  Top Layer w24: D12.1@151.55,-2333.06 151.55,-2436.48 CE4.1@262.36,-2547.29 432.84,-2547.29 PL1.1@523.71,-2456.42 523.71,-2652.39 C12.1@546.38,-2675.06 ; 151.55,-2413.4 ccw(c71.22,-2413.4) 128.02,-2356.59 cw(c71.22,-2413.4) 151.55,-2413.4 ; 151.55,-2413.4 cw(c231.89,-2413.4) 175.08,-2356.59 ccw(c231.89,-2413.4) 151.55,-2413.4 ; 304.68,-2547.29 ccw(c304.68,-2589.61) 274.76,-2559.69 cw(c304.68,-2589.61) 304.68,-2547.29 ; 304.68,-2547.29 cw(c304.68,-2504.98) 274.76,-2534.9 ccw(c304.68,-2504.98) 304.68,-2547.29 ; 483.7,-2496.43 ccw(c443.7,-2456.42) 500.27,-2456.42 cw(c443.7,-2456.42) 483.7,-2496.43 ; 483.7,-2496.43 cw(c523.71,-2536.43) 523.71,-2479.86 ccw(c523.71,-2536.43) 483.7,-2496.43 ; 523.71,-2513 ccw(c467.13,-2513) 507.14,-2472.99 cw(c467.13,-2513) 523.71,-2513 ; 523.71,-2513 cw(c580.28,-2513) 540.28,-2472.99 ccw(c580.28,-2513) 523.71,-2513 ; 178.13,-2463.06 ccw(c227.88,-2413.31) 255.48,-2478.02 cw(c227.88,-2413.31) 178.13,-2463.06 ; 203.24,-2488.17 ccw(c242.89,-2448.51) 264.9,-2500.1 cw(c242.89,-2448.51) 203.24,-2488.17 ; 228.35,-2513.28 ccw(c257.91,-2483.71) 274.32,-2522.17 cw(c257.91,-2483.71) 228.35,-2513.28 ; CE4.1@253.46,-2538.39 ccw(c272.93,-2518.91) 283.74,-2544.25 cw(c272.93,-2518.91) CE4.1@253.46,-2538.39 ; 523.71,-2614.06 ccw(c605.41,-2614.06) 547.63,-2671.84 cw(c605.41,-2614.06) 523.71,-2614.06
  Top Layer w25: D1.1@1221.52,-1309.14 v2(1221.52,-1494.22) v2@1269.2,-1494.22 ; v2@2056.97,-1410.97 2096.49,-1410.97 D2.1@2096.49,-1248.27 ; v3@3174.44,-1412.97 v3(3211.77,-1412.97) ; v3@3209.37,-1410.57 D4.1@3209.37,-1213.21 ; 2096.49,-1313.15 ccw(c2031.62,-1313.15) 2077.49,-1267.28 cw(c2031.62,-1313.15) 2096.49,-1313.15 ; 2096.49,-1313.15 cw(c2161.36,-1313.15) 2115.49,-1267.28 ccw(c2161.36,-1313.15) 2096.49,-1313.15 ; 3209.37,-1278.08 ccw(c3144.5,-1278.08) 3190.37,-1232.21 cw(c3144.5,-1278.08) 3209.37,-1278.08 ; 3209.37,-1278.08 cw(c3274.24,-1278.08) 3228.37,-1232.21 ccw(c3274.24,-1278.08) 3209.37,-1278.08 ; D1.1@1194.32,-1324.74 cw(c1128.65,-1390.41) 1221.52,-1390.41 ccw(c1128.65,-1390.41) D1.1@1194.32,-1324.74 ; 1221.52,-1350.81 cw(c1258.39,-1350.81) 1232.32,-1324.74 ccw(c1258.39,-1350.81) 1221.52,-1350.81
  Top Layer w40: G5.1@-15.81,-2485.75 101.69,-2485.75 ; C12.1@546.38,-2675.06 747.78,-2675.06 778.17,-2644.67 964.01,-2644.67 U3.3@1002.59,-2683.25 ; U3.3@1008.89,-2683.25 1076.61,-2683.25 1175.42,-2584.44 v3(1175.42,-1715.06) v3(1175.42,-1660.38) ; 21.45,-2485.75 ccw(c21.45,-2523.01) -4.9,-2496.66 cw(c21.45,-2523.01) 21.45,-2485.75 ; 21.45,-2485.75 cw(c21.45,-2448.49) -4.9,-2474.83 ccw(c21.45,-2448.49) 21.45,-2485.75
  Bottom Layer w25: v2@1267.98,-1494.38 1268.75,-1493.61 1349.38,-1412.97 v2@2098.49,-1412.97 ; v2@2099.02,-1412.97 v3(3173.01,-1412.97) v3(3211.77,-1412.97)
  Bottom Layer w40: 1169.05,-1629.92 1232.41,-1566.57 v2@1232.41,-1493.61 ; v3@1175.42,-1715.43 v3(1175.42,-1715.06) v3(1175.42,-1660.38) ; v2@1222.13,-1493.61 v2@1232.41,-1493.61 ; v2@1267.98,-1494.38 1267.98,-1567.82 v3(1175.42,-1660.38) ; v2(1269.81,-1493.61) 1268.75,-1493.61 v2@1232.41,-1493.61 ; P1.25@3646.78,-2756.94 2801.47,-2756.94 1709.43,-1664.9 1179.93,-1664.9 v3(1175.42,-1660.38) ; v3@1169.42,-1660.38 cw(c1243.82,-1660.38) 1191.21,-1607.77 ccw(c1243.82,-1660.38) v3@1169.42,-1660.38
  other v2: 2054.78,-1413.16 2098.49,-1412.98
+48V: +48V.1 AH.2 BH.2 C28.2 C29.2 C30.2 CE1.1 CE2.1 CH.2 G6.1 P3.1 R35.1 R49.1 | length 9894.8
  Top Layer w30: P3.1@29.39,-1790.6 35.05,-1784.94 97.39,-1784.94 372.99,-1509.34 372.99,-1013.53 ; +48V.1@187.72,-858.14 +48V.1@150.23,-820.65 ; 202.6,-1078.64 150.23,-1026.28 +48V.1@150.23,-1017.5 150.23,-999.63 214.44,-935.42 ; R35.1@715.63,-1110.14 715.63,-958.58 718.88,-955.33 ; 816.85,-303.92 919.12,-406.19 AH.2@960.46,-406.19 ; 1972.11,-223.34 1972.11,-326.23 BH.2@2050.06,-404.19 2113.48,-340.78 2113.48,-211.72 ; C30.2@4063.55,-203.97 CE2.1@4462.56,-203.97 ; 65.35,-1784.94 ccw(c65.35,-1820.01) 40.55,-1795.21 cw(c65.35,-1820.01) 65.35,-1784.94 ; 65.35,-1784.94 cw(c65.35,-1749.87) 40.55,-1774.67 ccw(c65.35,-1749.87) 65.35,-1784.94 ; +48V.1@150.23,-820.65 155.6,-820.65 218.58,-757.67 ; +48V.1@150.23,-820.65 150.23,-794.07 203.63,-740.68 ; 203.62,-740.68 ccw(c242.5,-779.56) 192.27,-801.92 cw(c242.5,-779.56) 203.62,-740.68 ; 214.44,-935.42 ccw(c267.13,-988.11) 194.87,-1006.28 cw(c267.13,-988.11) 214.44,-935.42 ; 218.57,-757.67 ccw(c273.15,-812.25) 196.15,-817.51 cw(c273.15,-812.25) 218.57,-757.67 ; 218.57,-757.67 cw(c172.31,-711.41) 159.35,-775.54 ccw(c172.31,-711.41) 218.57,-757.67 ; 715.63,-1073.93 ccw(c751.85,-1073.93) 726.24,-1099.54 cw(c751.85,-1073.93) 715.63,-1073.93 ; 715.64,-1073.93 cw(c679.42,-1073.93) 705.03,-1099.54 ccw(c679.42,-1073.93) 715.64,-1073.93 ; 898.31,-224.34 ccw(c967.36,-224.34) 964.35,-293.32 cw(c967.36,-224.34) 898.31,-224.34 ; 898.31,-224.33 898.31,-344.04 AH.2@960.46,-406.19 ; AH.2@960.46,-406.19 1035.9,-330.75 1035.9,-210.76 ; 1035.9,-210.76 cw(c953.27,-210.76) 956.73,-293.32 ccw(c953.27,-210.76) 1035.9,-210.76 ; 2113.48,-211.73 cw(c2033.12,-211.73) 2041.14,-291.68 ccw(c2033.12,-211.73) 2113.48,-211.73 ; 3087.56,-181.79 ccw(c3196.29,-181.79) 3172.71,-287.93 cw(c3196.29,-181.79) 3087.56,-181.79 ; 3087.56,-181.78 3087.56,-332.99 CH.2@3153.33,-398.76 3216.82,-335.26 3216.82,-195.96 ; 3216.82,-195.97 cw(c3124.72,-195.97) 3139.24,-286.92 ccw(c3124.72,-195.97) 3216.82,-195.97 ; +48V.1@150.23,-971.47 ccw(c150.23,-903.49) 198.3,-951.56 cw(c150.23,-903.49) +48V.1@150.23,-971.47 ; +48V.1@150.23,-774.62 ccw(c150.23,-727.67) 183.43,-760.87 cw(c150.23,-727.67) +48V.1@150.23,-774.62 ; 853.9,-340.97 cw(c812.3,-382.57) 871.13,-382.57 ccw(c812.3,-382.57) 853.9,-340.97 ; AH.2@898.31,-287.01 ccw(c964.63,-287.01) 961.74,-353.27 cw(c964.63,-287.01) AH.2@898.31,-287.01 ; 898.31,-255.67 ccw(c965.99,-255.67) 963.05,-323.3 cw(c965.99,-255.67) 898.31,-255.67 ; AH.2@957.98,-323.29 ccw(c954.58,-242.04) 1035.9,-242.04 cw(c954.58,-242.04) AH.2@957.98,-323.29 ; AH.2@959.24,-353.26 ccw(c955.89,-273.32) 1035.9,-273.32 cw(c955.89,-273.32) AH.2@959.24,-353.26 ; AH.2@960.49,-383.24 ccw(c957.2,-304.61) 1035.9,-304.61 cw(c957.2,-304.61) AH.2@960.49,-383.24 ; BH.2@2044.14,-321.53 ccw(c2036.45,-244.89) 2113.48,-244.89 cw(c2036.45,-244.89) BH.2@2044.14,-321.53 ; BH.2@2047.14,-351.38 ccw(c2039.78,-278.05) 2113.48,-278.05 cw(c2039.78,-278.05) BH.2@2047.14,-351.38 ; CH.2@3087.56,-293.98 ccw(c3171.36,-293.98) 3153.19,-375.79 cw(c3171.36,-293.98) CH.2@3087.56,-293.98 ; 3087.56,-256.58 ccw(c3179.67,-256.58) 3159.69,-346.5 cw(c3179.67,-256.58) 3087.56,-256.58 ; 3087.56,-219.19 ccw(c3187.98,-219.19) 3166.2,-317.21 cw(c3187.98,-219.19) 3087.56,-219.19 ; CH.2@3143.97,-316.54 ccw(c3130.33,-231.14) 3216.82,-231.14 cw(c3130.33,-231.14) CH.2@3143.97,-316.54 ; CH.2@3148.7,-346.17 ccw(c3135.95,-266.31) 3216.82,-266.31 cw(c3135.95,-266.31) CH.2@3148.7,-346.17 ; 4407.6,-203.97 ccw(c4407.6,-134.46) 4456.75,-183.61 cw(c4407.6,-134.46) 4407.6,-203.97 ; 4415.98,-203.97 cw(c4415.98,-261.63) 4456.75,-220.86 ccw(c4415.98,-261.63) 4415.98,-203.97
  Bottom Layer w30: +48V.1@150.23,-1017.5 299.05,-1017.5 ; +48V.1@150.23,-820.65 301.98,-820.65 ; 261.34,-1017.5 ccw(c261.34,-1128.61) 182.77,-1050.04 cw(c261.34,-1128.61) 261.34,-1017.5 ; 261.34,-1017.5 cw(c261.34,-906.39) 182.77,-984.95 ccw(c261.34,-906.39) 261.34,-1017.5 ; 261.34,-820.65 ccw(c261.34,-931.76) 182.77,-853.19 cw(c261.34,-931.76) 261.34,-820.65 ; 261.34,-820.65 cw(c261.34,-709.54) 182.77,-788.1 ccw(c261.34,-709.54) 261.34,-820.65 ; 253.79,-1017.5 cw(c253.79,-1090.14) 305.15,-1038.77 ccw(c253.79,-1090.14) 253.79,-1017.5
  other v1: 414.21,-1044.94 303.74,-1040.19 407.08,-862.01 359.57,-777.67 674.35,-679.08 346.5,-674.33 500.92,-670.76 652.97,-610.18 481.91,-582.86 690.98,-537.72 797.88,-418.94 755.12,-301.34 610.2,-300.15 600.71,-196.8 753.93,-196.81 929.74,-192.06
  other v2: 667.79,-77.65 907.79,-77.65 1147.79,-77.65 1387.79,-77.65 1627.79,-77.65 1867.79,-77.65 2107.79,-77.65 2347.79,-77.65 3067.79,-77.65 3307.79,-77.65 3547.79,-77.65 3787.79,-77.65 4027.79,-77.65 4267.79,-77.65 4507.79,-77.65 2665.96,-75.9 2872.48,-64.5 658.82,43.38 908.23,49.24 1168.05,50.46 1408.05,50.46 1648.05,50.46 1888.05,50.46 2128.05,50.46 2368.05,50.46 2608.05,50.46 2848.05,50.46 3088.05,50.46 3328.05,50.46 3568.05,50.46 3808.05,50.46 4048.05,50.46 4288.05,50.46 4528.05,50.46
AI: AL.3 P5.3 R15.1 | length 1507.7
  Top Layer w10: P5.3@1667.29,-1137.04 1688.86,-1115.47 ; R15.1@1812.75,-774.75 1900.89,-774.75 ; 1688.86,-1115.47 ccw(c1699.58,-1126.19) 1687.82,-1135.76 cw(c1699.58,-1126.19) 1688.86,-1115.47 ; 1688.86,-1115.47 1915.17,-1115.47 1955.26,-1075.38 1955.26,-829.12 1900.89,-774.75 ; 1900.88,-774.75 ccw(c1900.88,-820.38) 1866.35,-790.55 cw(c1900.88,-820.38) 1900.88,-774.75 ; 1900.88,-774.75 cw(c1900.88,-729.97) 1866.58,-758.75 ccw(c1900.88,-729.97) 1900.88,-774.75 ; P5.3@1668.79,-1126.71 ccw(c1668.79,-1105.39) 1683.86,-1120.46 cw(c1668.79,-1105.39) P5.3@1668.79,-1126.71 ; P5.3@1680.06,-1142.07 cw(c1690.94,-1133.22) 1681.02,-1123.31 ccw(c1690.94,-1133.22) P5.3@1680.06,-1142.07 ; R15.1@1858.78,-784.01 cw(c1879.03,-801.5) 1879.03,-774.75 ccw(c1879.03,-801.5) R15.1@1858.78,-784.01 ; R15.1@1858.92,-765.18 ccw(c1879.44,-747.96) 1879.44,-774.75 cw(c1879.44,-747.96) R15.1@1858.92,-765.18
  Top Layer w20: AL.3@1767.23,-641.42 1767.23,-653.96 1812.75,-699.47 R15.1@1812.75,-785.32 ; AL.3@1765.98,-665.34 cw(c1771.27,-679.93) 1782.24,-668.96 ccw(c1771.27,-679.93) AL.3@1765.98,-665.34 ; AL.3@1772.8,-684.14 cw(c1783.1,-712.53) 1804.46,-691.18 ccw(c1783.1,-712.53) AL.3@1772.8,-684.14 ; R15.1@1798.55,-760.71 ccw(c1764.26,-726.42) 1812.75,-726.42 cw(c1764.26,-726.42) R15.1@1798.55,-760.71 ; 1812.75,-728.33 ccw(c1858.55,-728.33) 1826.17,-760.71 cw(c1858.55,-728.33) 1812.75,-728.33
AP: P2.15 P5.2 | length 1322.9
  Top Layer w8: P5.2@1567.29,-1137.04 1567.29,-1173.14 1610.43,-1216.27 1692.55,-1216.27 1723.11,-1246.83 1723.11,-1527.41 1607.69,-1642.83 1607.69,-1722.25 ; P2.15@1642.25,-1756.82 1607.69,-1722.25 ; 1607.69,-1722.26 ccw(c1631.75,-1698.19) 1637.75,-1731.69 cw(c1631.75,-1698.19) 1607.69,-1722.26 ; 1607.69,-1722.26 cw(c1583.63,-1746.32) 1617.12,-1752.32 ccw(c1583.63,-1746.32) 1607.69,-1722.26 ; 1618.52,-1733.09 ccw(c1635.04,-1716.57) 1639.16,-1739.56 cw(c1635.04,-1716.57) 1618.52,-1733.09 ; 1618.52,-1733.09 cw(c1602,-1749.61) 1625,-1753.73 ccw(c1602,-1749.61) 1618.52,-1733.09 ; P5.2@1570.16,-1151.91 ccw(c1592.8,-1162.99) 1574.98,-1180.82 cw(c1592.8,-1162.99) P5.2@1570.16,-1151.91 ; P5.2@1577.34,-1155.43 ccw(c1603.43,-1168.2) 1582.89,-1188.74 cw(c1603.43,-1168.2) P5.2@1577.34,-1155.43 ; P5.2@1584.53,-1158.94 ccw(c1614.06,-1173.4) 1590.81,-1196.66 cw(c1614.06,-1173.4) P5.2@1584.53,-1158.94 ; P5.2@1591.71,-1162.46 ccw(c1624.7,-1178.61) 1598.73,-1204.57 cw(c1624.7,-1178.61) P5.2@1591.71,-1162.46
AX: A.1 AH.3 AL.2 C7.2 C25.2 P1.6 P5.1 R1.2 R32.2 | length 5933.1
  Top Layer w10: P1.6@3550.22,-2259.28 P1.6@3550.22,-2244.09
  Top Layer w20: C7.2@1003.98,-766.09 1003.98,-705.19 AH.3@1051.01,-658.16 ; A.1@1224.31,-723.16 1244.1,-742.95 1244.1,-769.5 ccw(c1259.1,-769.5) 1259.1,-784.5 1349.1,-784.5 cw(c1349.1,-799.5) 1364.1,-799.5 1364.1,-819.5 cw(c1349.1,-819.5) 1349.1,-834.5 1139.1,-834.5 ccw(c1139.1,-849.5) 1124.1,-849.5 1124.1,-869.5 ccw(c1139.1,-869.5) 1139.1,-884.5 1349.1,-884.5 cw(c1349.1,-899.5) 1364.1,-899.5 1364.1,-919.5 cw(c1349.1,-919.5) 1349.1,-934.5 1139.1,-934.5 ccw(c1139.1,-949.5) 1124.1,-949.5 1124.1,-969.5 ccw(c1139.1,-969.5) 1139.1,-984.5 1229.1,-984.5 cw(c1229.1,-999.5) C25.2@1244.09,-999.32 ; v2(1521.85,-1610.9) 1521.84,-1331.55 R1.2@1564.85,-1288.54 1467.29,-1190.99 1467.29,-1137.04 1329.76,-999.5 C25.2@1244.1,-999.5 ; AL.2@1710.62,-454.72 1710.62,-472.22 1760.2,-521.8 R32.2@1857.9,-521.8 ; C25.2@1244.1,-999.5 ccw(c1229.1,-999.5) C25.2@1244.09,-999.32 ; C25.2@1244.1,-999.5 1244.1,-1009.5 C25.2@1240.79,-992.65 1237.41,-999.32 C25.2@1244.09,-999.32 ; 1467.29,-1191.01 ccw(c1433.94,-1191.01) 1455.92,-1165.93 cw(c1433.94,-1191.01) 1467.29,-1191.01 ; 1467.29,-1191.01 cw(c1495.91,-1191.01) 1479.79,-1167.37 ccw(c1495.91,-1191.01) 1467.29,-1191.01 ; C7.2@997.6,-760.73 ccw(c982.19,-745.32) 1003.98,-745.32 cw(c982.19,-745.32) C7.2@997.6,-760.73 ; 1013.74,-695.43 cw(c1042.93,-724.62) 1052.23,-684.4 ccw(c1042.93,-724.62) 1013.74,-695.43 ; AH.3@1039.25,-669.93 cw(c1052.51,-683.19) 1056.73,-664.91 ccw(c1052.51,-683.19) AH.3@1039.25,-669.93 ; 1179.15,-984.5 cw(c1179.15,-1052.32) 1227.1,-1004.37 ccw(c1179.15,-1052.32) 1179.15,-984.5 ; A.1@1213.41,-733.64 cw(c1205.08,-771.76) 1244.1,-771.76 ccw(c1205.08,-771.76) A.1@1213.41,-733.64 ; A.1@1217.68,-714.1 cw(c1210.51,-746.91) 1244.1,-746.91 ccw(c1210.51,-746.91) A.1@1217.68,-714.1 ; 1244.1,-759.21 cw(c1299.72,-759.21) 1260.39,-719.87 ccw(c1299.72,-759.21) 1244.1,-759.21 ; C25.2@1254.48,-980.93 ccw(c1299.33,-936.08) 1299.33,-999.5 cw(c1299.33,-936.08) C25.2@1254.48,-980.93 ; 1426.46,-1096.21 cw(c1371.43,-1151.24) 1449.26,-1151.24 ccw(c1371.43,-1151.24) 1426.46,-1096.21 ; 1539.25,-1314.15 cw(c1564.85,-1339.76) 1564.85,-1303.54 ccw(c1564.85,-1339.76) 1539.25,-1314.15 ; 1539.25,-1262.94 ccw(c1564.85,-1237.33) 1564.85,-1273.54 cw(c1564.85,-1237.33) 1539.25,-1262.94 ; R1.2@1547.32,-1306.07 ccw(c1533.14,-1291.89) 1553.2,-1291.89 cw(c1533.14,-1291.89) R1.2@1547.32,-1306.07 ; R1.2@1547.32,-1271.02 cw(c1533.14,-1285.2) 1553.2,-1285.2 ccw(c1533.14,-1285.2) R1.2@1547.32,-1271.02 ; 1820.45,-521.8 ccw(c1820.45,-472.36) 1855.41,-507.32 cw(c1820.45,-472.36) 1820.45,-521.8
  Bottom Layer w20: v2@1521.72,-1610.89 1770.59,-1610.89 2416.52,-2256.82 P1.6@3542.25,-2256.82 ; 3495.11,-2256.82 ccw(c3495.11,-2209.67) 3528.44,-2243.01 cw(c3495.11,-2209.67) 3495.11,-2256.82 ; 3495.11,-2256.82 cw(c3495.11,-2303.96) 3528.44,-2270.62 ccw(c3495.11,-2303.96) 3495.11,-2256.82
  other v3: 1191.23,-604.93 1429.89,-603.39 1322.11,-598.78 1435.28,-511.01 1323.65,-497.92 1193.54,-494.07 1528.43,-419.4 1327.5,-388.6 1198.16,-386.29 1438.36,-382.44
BI: BL.3 P6.3 R16.2 | length 1855.3
  Top Layer w10: P6.3@2717.75,-1146.43 2979.37,-1146.43 3032.42,-1093.38 3032.42,-789.64 3022.06,-779.28 ; R16.2@2928.85,-779.28 3022.06,-779.28 ; 3022.06,-779.28 cw(c3022.06,-698.28) 2963.36,-754.1 ccw(c3022.06,-698.28) 3022.06,-779.28 ; P6.3@2728.02,-1161.51 cw(c2764.44,-1197.92) 2764.44,-1146.43 ccw(c2764.44,-1197.92) P6.3@2728.02,-1161.51 ; P6.3@2735.09,-1168.58 cw(c2788.58,-1222.06) 2788.58,-1146.43 ccw(c2788.58,-1222.06) P6.3@2735.09,-1168.58 ; P6.3@2735.09,-1133.89 ccw(c2765.35,-1103.64) 2765.35,-1146.43 cw(c2765.35,-1103.64) P6.3@2735.09,-1133.89 ; R16.2@2948.86,-767.88 ccw(c2975.44,-742.61) 2975.44,-779.28 cw(c2975.44,-742.61) R16.2@2948.86,-767.88 ; R16.2@2956.11,-760.99 ccw(c2998.75,-720.44) 2998.75,-779.28 cw(c2998.75,-720.44) R16.2@2956.11,-760.99 ; R16.2@2962.93,-788.35 cw(c2984.8,-810.22) 2984.8,-779.28 ccw(c2984.8,-810.22) R16.2@2962.93,-788.35
  Top Layer w20: BL.3@2858.32,-639.99 2878.07,-639.99 2918.43,-680.35 R16.2@2918.43,-785.12 ; BL.3@2843.51,-638.78 cw(c2858.37,-672.8) 2884.62,-646.55 ccw(c2858.37,-672.8) BL.3@2843.51,-638.78 ; BL.3@2851.52,-657.11 cw(c2870.98,-701.65) 2905.35,-667.28 ccw(c2870.98,-701.65) BL.3@2851.52,-657.11 ; R16.2@2896.34,-757.19 ccw(c2843.02,-703.87) 2918.43,-703.87 cw(c2843.02,-703.87) R16.2@2896.34,-757.19
BP: P1.15 P6.2 | length 1462.3
  Top Layer w10: P6.2@2617.75,-1151.24 2617.75,-1192.54 ; P1.15@3642.25,-1756.82 3611.25,-1725.82 3611.25,-1612.58 3559.99,-1561.32 3154.18,-1561.32 2799.34,-1206.49 2631.7,-1206.49 2617.75,-1192.54 ; 2617.75,-1192.54 ccw(c2595.25,-1192.54) 2606.01,-1172.78 cw(c2595.25,-1192.54) 2617.75,-1192.54 ; 2617.75,-1192.54 cw(c2640.26,-1192.54) 2629.49,-1172.78 ccw(c2640.26,-1192.54) 2617.75,-1192.54